# EAGLE board parametric_eq (EAGLE 7.2.0)
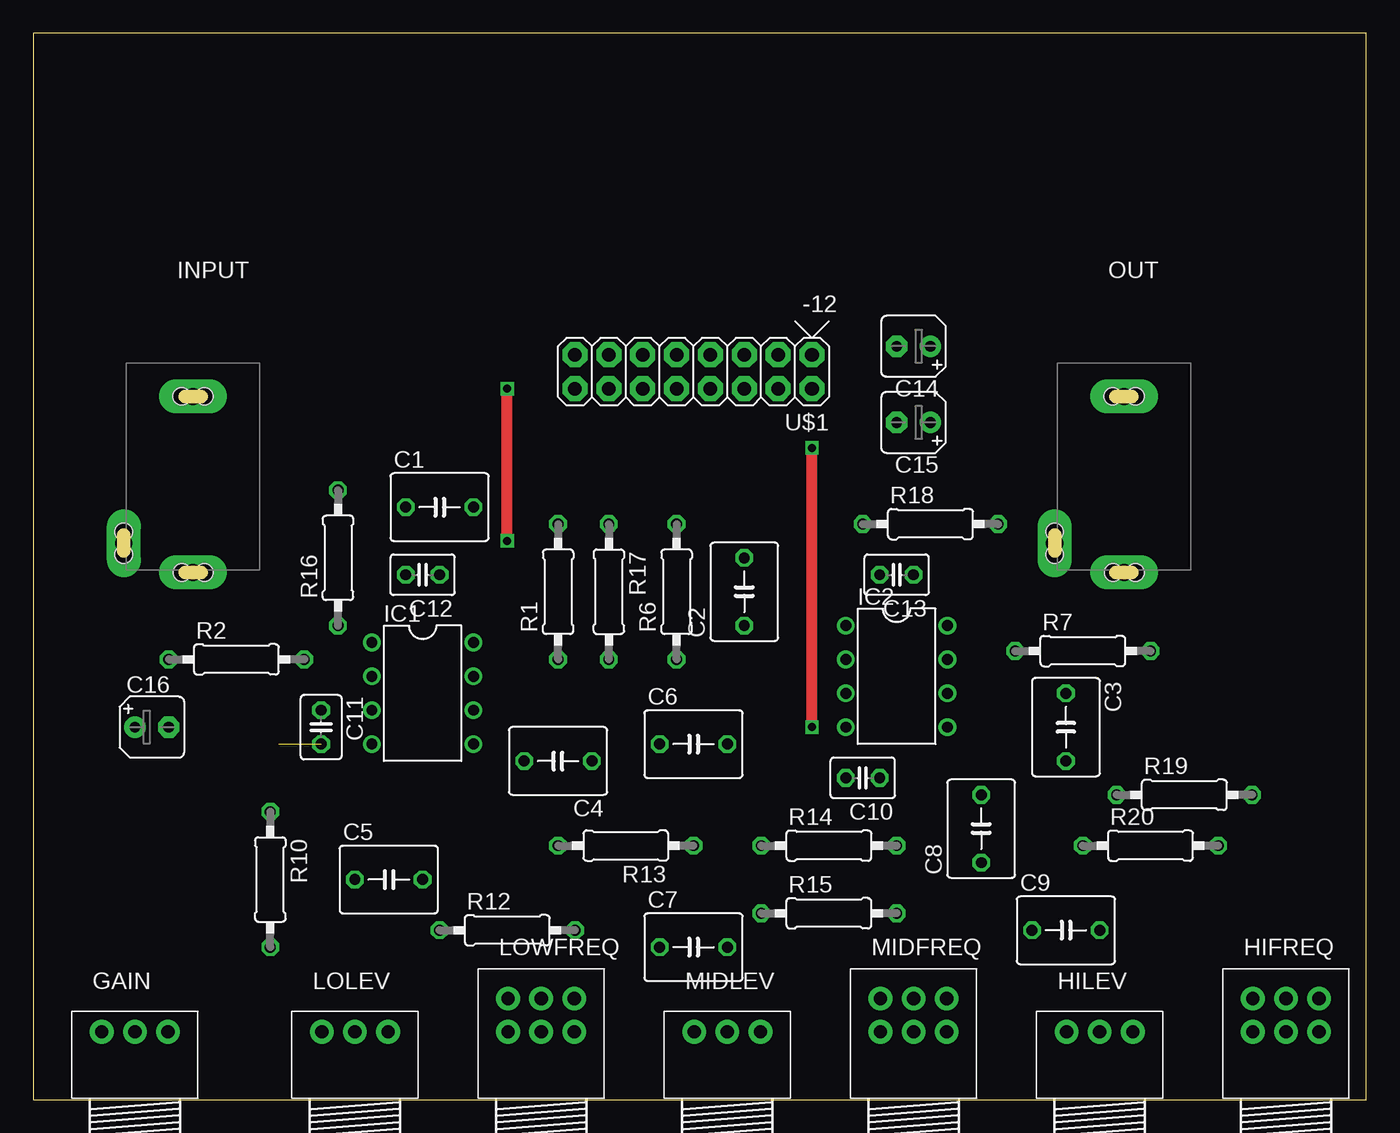
[diagram p0: board, top side]
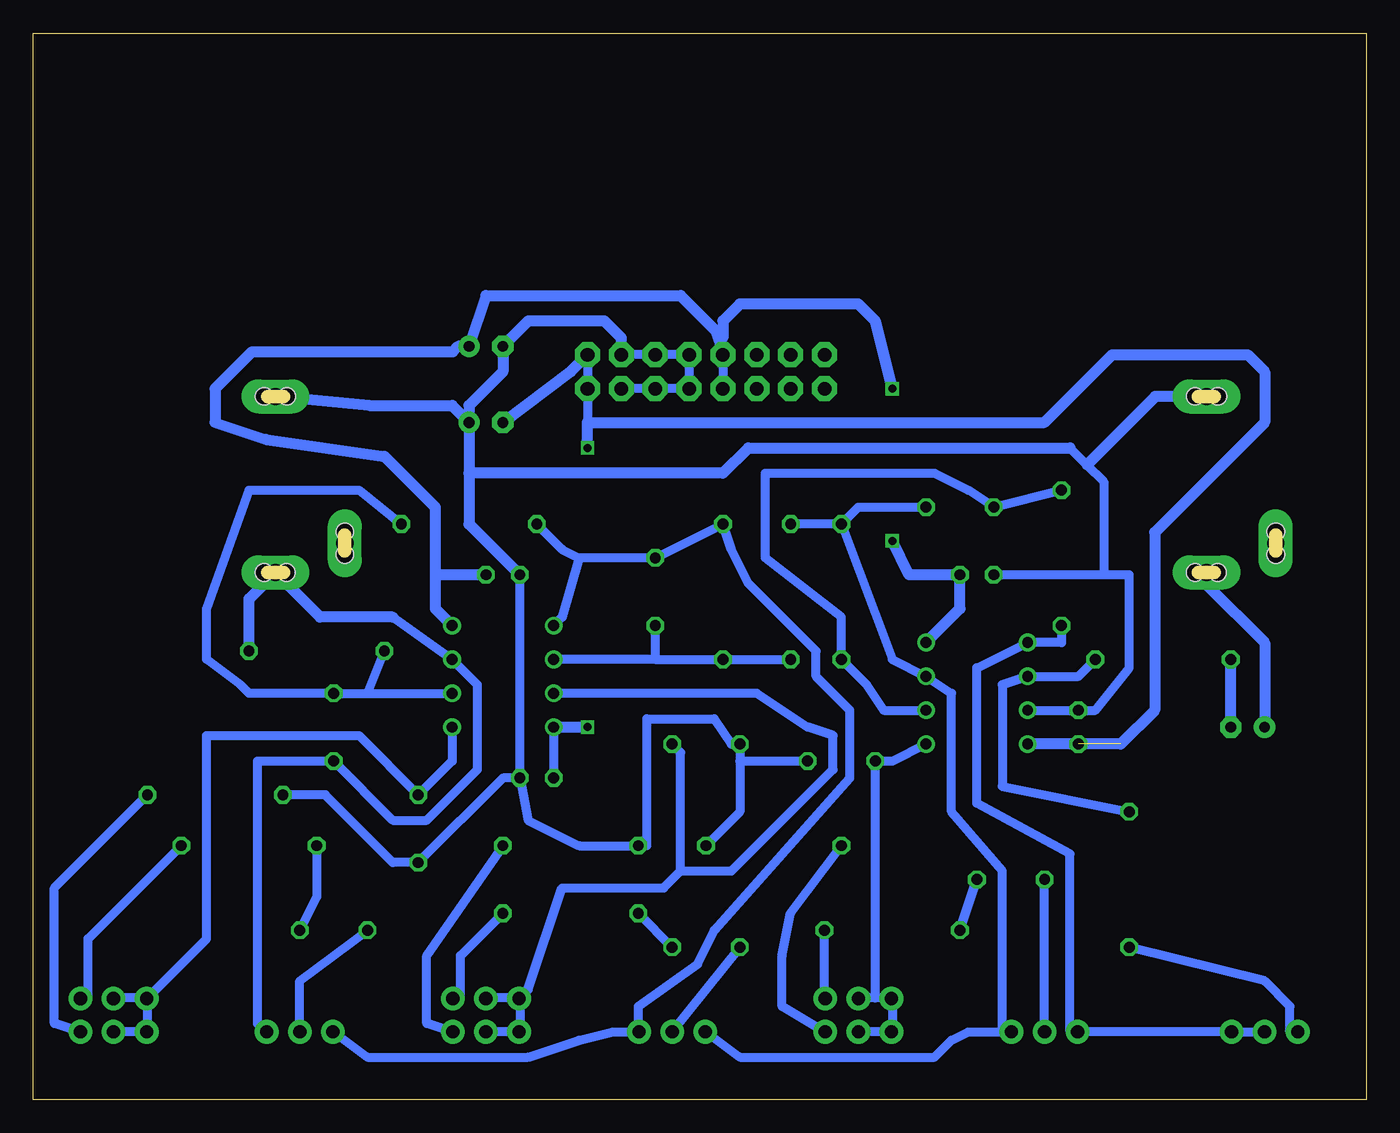
[diagram p1: board, bottom side, seen from below]

Size 100 x 80 mm. Coordinates in mm from the lower left corner, seen from the top.
Outline: 0,0 100,0 100,80 0,80 0,0
Copper layers (1*16): Top 0.035mm / dielectric 1.5mm / Bottom 0.035mm
Design rules "default *": minimum track width 26mil, minimum drill 24mil, track to track 18mil, track to pad 18mil, pad to pad 18mil, via to via 18mil, smd to smd 8mil, copper to edge 0mil, drill to drill 8mil, minimum pad ring 10mil, minimum via ring 8mil, stop-mask expansion 4mil, vias tented up to drill 0mil, thermal gap 10mil

## Footprints (pad centres in the part's own frame; a part is rotated, then mirrored left to right if it is on the bottom)
C050-050X075 = drill 0.813 octagon: 1 -2.54,0; 2 2.54,0
C025-030X050 = drill 0.813 octagon: 1 -1.27,0; 2 1.27,0
B45181A = drill 0.813 pad 1.6: + -1.27,0 | drill 0.813 pad 1.6 octagon: - 1.27,0
PTD901 = drill 1 pad 1.778: 1 -2.485,0; 2 0,0; 3 2.485,0
PTD902 = drill 1 pad 1.778: 1-1 -2.485,0; 1-2 0,0; 1-3 2.485,0; 2-1 -2.485,2.485; 2-2 0,2.485; 2-3 2.485,2.485
DIL08 = drill 0.813 pad 1.27: 1 -3.81,-3.81; 2 -1.27,-3.81; 3 1.27,-3.81; 4 3.81,-3.81; 5 3.81,3.81; 6 1.27,3.81; 7 -1.27,3.81; 8 -3.81,3.81
ERTHENVAR-JACK-90DEG = drill 1.3 pad 2.54 long: P$1 5,-2.5; P$2 -0.2,-13.5; P$3 5,-15.7 | hole 1.3: 5.842,-2.489; 4.14,-2.489; -0.203,-12.649; -0.203,-14.351; 5.842,-15.697; 4.166,-15.697
0207/10 = drill 0.813 octagon: 1 -5.08,0; 2 5.08,0
POWER_16 = drill 1.016 pad 1.88 octagon: 1 -6.35,-1.27; 2 -6.35,1.27; 3 -3.81,-1.27; 4 -3.81,1.27; 5 -1.27,-1.27; 6 -1.27,1.27; 7 1.27,-1.27; 8 1.27,1.27; 9 3.81,-1.27; 10 3.81,1.27; 11 6.35,-1.27; 12 6.35,1.27; 13 8.89,-1.27; 14 8.89,1.27; 15 11.43,-1.27; 16 11.43,1.27

## Placement (x,y rotation side)
C1  330p  [C050-050X075]  30.48,44.45 0 top
C2  330p  [C050-050X075]  53.34,38.1 90 top
C3  330p  [C050-050X075]  77.47,27.94 270 top
C4  39n  [C050-050X075]  39.37,25.4 180 top
C5  100n  [C050-050X075]  26.67,16.51 0 top
C6  5n6  [C050-050X075]  49.53,26.67 0 top
C7  15n  [C050-050X075]  49.53,11.43 0 top
C8  1n8  [C050-050X075]  71.12,20.32 90 top
C9  4n7  [C050-050X075]  77.47,12.7 0 top
C10  0.1u  [C025-030X050]  62.23,24.13 180 top
C11  0.1u  [C025-030X050]  21.59,27.94 270 top
C12  0.1u  [C025-030X050]  29.21,39.37 180 top
C13  0.1u  [C025-030X050]  64.77,39.37 180 top
C14  10u  [B45181A]  66.04,56.52 180 top
C15  10u  [B45181A]  66.04,50.8 180 top
C16  10u  [B45181A]  8.89,27.94 0 top
GAIN  5k lin  [PTD901]  7.62,5.08 0 top
HIFREQ  50k log  [PTD902]  93.98,5.08 0 top
HILEV  5k lin  [PTD901]  80.01,5.08 0 top
IC1  TL072P  [DIL08]  29.21,30.48 270 top
IC2  TL072P  [DIL08]  64.77,31.75 270 top
INPUT  AUDIO-JACK  [ERTHENVAR-JACK-90DEG]  6.99,55.24 0 top
LOLEV  5k lin  [PTD901]  24.13,5.08 0 top
LOWFREQ  50k log  [PTD902]  38.1,5.08 0 top
MIDFREQ  50k log  [PTD902]  66.04,5.08 0 top
MIDLEV  5k lin  [PTD901]  52.07,5.08 0 top
OUT  AUDIO-JACK  [ERTHENVAR-JACK-90DEG]  76.83,55.24 0 top
R1  2k2  [0207/10]  39.37,38.1 90 top
R2  2k  [0207/10]  15.24,33.02 0 top
R6  2k2  [0207/10]  48.26,38.1 90 top
R7  2k2  [0207/10]  78.74,33.66 0 top
R10  1k  [0207/10]  17.78,16.51 270 top
R12  4k7  [0207/10]  35.56,12.7 0 top
R13  5k1  [0207/10]  44.45,19.05 180 top
R14  2k7  [0207/10]  59.69,19.05 0 top
R15  2k7  [0207/10]  59.69,13.97 0 top
R16  2k2  [0207/10]  22.86,40.64 90 top
R17  2k2  [0207/10]  43.18,38.1 270 top
R18  2k2  [0207/10]  67.31,43.18 0 top
R19  4k7  [0207/10]  86.36,22.86 0 top
R20  4k3  [0207/10]  83.82,19.05 0 top
U$1  POWER  [POWER_16]  52.07,54.61 180 top

## Library data of the parts
C1-C16 R1 R2 R6 R7 R10 R12-R20 = rcl
GAIN HIFREQ HILEV LOLEV LOWFREQ MIDFREQ MIDLEV = bourns_ptd
IC1 IC2 = linear
INPUT OUT = erthenvar
U$1 = eurorack

## Nets
+12V: C12.1 C13.1 C14.+ IC1.8 IC2.8 U$1.9 U$1.10
-12V: C10.2 C11.2 C15.- IC1.4 IC2.4 U$1.1 U$1.2
GND: C4.1 C6.1 C8.1 C10.1 C11.1 C12.2 C13.2 C14.- C15.+ IC1.3 INPUT.P$1 OUT.P$1 R13.1 R14.1 R19.1 U$1.3 U$1.4 U$1.5 U$1.6 U$1.7 U$1.8
N$1: IC1.2 R2.2 R10.1
N$2: GAIN.1 R10.2
N$3: C2.1 IC2.2 R6.1 R17.2
N$4: C3.1 IC2.6 R7.1 R18.2
N$5: C1.1 IC1.6 R1.1 R16.2
N$6: C1.2 IC1.7 LOLEV.3 MIDLEV.1 R1.2 R17.1
N$7: C2.2 HILEV.1 IC2.1 MIDLEV.3 R6.2 R18.1
N$8: C3.2 HILEV.3 IC2.7 OUT.P$3 R7.2
N$9: C16.+ INPUT.P$3
N$10: LOWFREQ.1-3 R13.2
N$11: C5.2 R12.1
N$12: LOWFREQ.2-3 R12.2
N$13: C5.1 LOLEV.2
N$14: C7.1 MIDLEV.2
N$15: C7.2 R15.1
N$16: MIDFREQ.2-3 R15.2
N$17: MIDFREQ.1-3 R14.2
N$18: HIFREQ.1-3 R19.2
N$19: HIFREQ.2-3 R20.2
N$20: C9.2 R20.1
N$21: C9.1 HILEV.2
N$22: C4.2 IC1.5 LOWFREQ.1-1 LOWFREQ.1-2 LOWFREQ.2-1 LOWFREQ.2-2
N$23: GAIN.2 GAIN.3 IC1.1 LOLEV.1 R16.1
N$24: C16.- R2.1
N$27: C6.2 IC2.3 MIDFREQ.1-1 MIDFREQ.1-2 MIDFREQ.2-1 MIDFREQ.2-2
N$28: C8.2 HIFREQ.1-1 HIFREQ.1-2 HIFREQ.2-1 HIFREQ.2-2 IC2.5

## Tracks (layer width: path | path; a pad name or v marks a point on that pad's centre or on a via)
+12V  (via drill 0.6)
  Top 0.813: v35.56,41.91 v35.56,53.34
  Bottom 0.66: U$1.10 U$1.9 48.9,57.78
  Bottom 0.813: v35.56,41.91 34.29,39.37 C12.1 30.48,36.83 IC1.8 | v35.56,53.34 36.83,58.42 38.1,59.69 46.99,59.69 48.26,58.42 48.26,57.15 48.9,57.78 51.44,60.33 66.04,60.33 C14.+ 68.11,56.52 68.54,56.09 83.61,56.09 86.36,53.34 86.36,50.8 82.55,49.53 73.66,48.26 69.85,44.45 69.85,39.37 | C13.1 69.85,39.37 | 69.85,39.37 69.85,36.83 IC2.8
-12V  (via drill 0.6)  (1 unrouted)
  Top 0.813: v58.42,27.94 v58.42,48.9
  Bottom 0.66: U$1.1 U$1.2 58.42,50.8 | IC2.4 C10.2
  Bottom 0.813: IC2.4 v58.42,27.94 | v58.42,48.9 58.42,50.8 24.13,50.8 19.05,55.88 8.89,55.88 7.62,54.61 7.62,50.8 15.88,42.55 15.88,29.21 18.41,26.67 IC1.4 | C15.- 59.69,54.61 U$1.1
GND
  Bottom 0.66: IC1.3 C11.1 20.32,29.21 17.78,32.38 17.78,39.37 19.68,39.37 | 19.68,39.37 C12.2 | R13.1 46.99,21.59 46.99,25.4 | 46.99,25.4 C6.1 47.62,26.67 48.9,28.57 53.98,28.57 53.98,19.05 R14.1 59.05,19.05 62.87,20.95 C10.1 | 46.99,25.4 C4.1 | U$1.4 U$1.6 U$1.8 U$1.7 U$1.5 U$1.3 | C10.1 64.77,24.13 C8.1 73.03,17.78 78.11,22.86 R19.1 | C10.1 C13.2 | 19.68,39.37 19.68,46.35 20.95,47.62 22.23,48.9
  Bottom 0.813: OUT.P$1 74.81,52.07 68.58,52.07 C15.+ | 67.31,46.99 48.26,46.99 46.35,48.9 22.23,48.9 | C15.+ 67.31,46.99 | 67.31,46.99 67.31,43.18 C13.2 | U$1.3 55.88,57.15 57.15,58.42 62.87,58.42 C14.- 64.77,54.61 67.31,52.07 C15.+ | INPUT.P$1 15.84,52.74 20.95,47.62
N$1
  Bottom 0.66: R10.1 27.3,23.5 27.3,31.11 IC1.2 21.59,31.75 R2.2
N$2
  Bottom 0.66: R10.2 7.62,8.89 5.71,6.99 5.71,5.08 GAIN.1
N$3
  Bottom 0.66: R17.2 R6.1 53.34,33.02 | 53.34,33.02 IC2.2 | C2.1 53.34,33.02
N$4
  Bottom 0.66: 74.93,30.48 C3.1 83.82,30.48 84.45,31.11 87,33.02 87,36.83 83.82,45.72 75.56,45.72 R18.2 | 74.93,30.48 IC2.6 | 74.93,30.48 R7.1
N$5
  Bottom 0.66: R16.2 C1.1 29.84,45.72 32.38,46.99 45.09,46.99 45.09,40.64 39.37,36.2 R1.1 37.47,31.11 36.2,29.21 IC1.6
N$6
  Bottom 0.66: R1.2 35.56,33.02 IC1.7 31.11,30.48 31.11,21.59 27.3,17.14 27.3,5.08 | R1.2 R17.1 | C1.2 38.1,44.45 R1.2 | 27.3,5.08 29.84,5.08 31.11,4.45 32.38,3.17 46.99,3.17 49.53,5.08 MIDLEV.1 | 27.3,5.08 LOLEV.3 26.67,5.08
N$7
  Bottom 0.66: IC2.1 60.33,36.2 59.05,40.64 | 59.05,40.64 60.33,41.27 R18.1 | 59.05,40.64 C2.2 R6.2 47.62,41.27 46.35,38.73 41.27,33.66 41.27,31.75 38.73,29.21 38.73,24.13 48.9,12.7 50.16,10.16 54.61,6.99 54.61,5.71 MIDLEV.3 56.52,5.08 59.05,4.45 62.87,3.17 74.93,3.17 77.47,5.08 HILEV.1
N$8
  Bottom 0.66: 73.03,36.2 IC2.7 66.67,31.11 66.67,24.77 70.48,20.95 73.03,20.95 C3.2 83.19,25.4 83.19,5.71 82.55,5.08 HILEV.3
  Bottom 0.813: 73.03,36.2 78.48,36.2 OUT.P$3 83.82,37.56 R7.2
N$9
  Bottom 0.813: INPUT.P$3 11.98,38.66 7.62,34.29 C16.+
N$10
  Bottom 0.66: R13.2 43.18,13.97 43.81,10.79 43.81,6.99 40.64,5.08 LOWFREQ.1-3
N$11
  Bottom 0.66: R12.1 C5.2
N$12
  Bottom 0.66: R12.2 40.64,7.62 LOWFREQ.2-3
N$13
  Bottom 0.66: LOLEV.2 C5.1
N$14
  Bottom 0.66: MIDLEV.2 C7.1
N$15
  Bottom 0.66: R15.1 C7.2
N$16
  Bottom 0.66: R15.2 67.94,10.79 67.94,7.62 MIDFREQ.2-3
N$17
  Bottom 0.66: R14.2 70.48,10.79 70.48,5.71 68.58,5.08 MIDFREQ.1-3
N$18
  Bottom 0.66: R19.2 98.42,15.88 98.42,5.71 96.52,5.08 HIFREQ.1-3
N$19
  Bottom 0.66: R20.2 95.89,12.06 95.89,7.62 HIFREQ.2-3
N$20
  Bottom 0.66: C9.2 78.74,15.24 R20.1
N$21
  Bottom 0.66: C9.1 80.01,8.89 HILEV.2
N$22
  Bottom 0.66: IC1.5 35.56,25.4 C4.2 36.83,7.62 | LOWFREQ.1-2 LOWFREQ.1-1 35.56,5.08 35.56,6.99 LOWFREQ.2-1 36.2,7.62 36.83,7.62 | 36.83,7.62 38.1,7.62 LOWFREQ.2-2
N$23
  Bottom 0.66: R16.1 22.86,34.29 IC1.1 29.21,32.38 29.21,22.23 22.23,18.41 22.23,5.08 LOLEV.1 GAIN.3 GAIN.2
N$24
  Bottom 0.813: C16.- R2.1
N$27
  Bottom 0.66: C6.2 51.44,26.04 51.44,17.14 | 51.44,17.14 52.7,15.88 60.33,15.88 62.87,8.26 MIDFREQ.2-1 | IC2.3 45.72,30.48 41.91,27.94 40.01,27.3 40.01,24.77 47.62,17.14 51.44,17.14 | MIDFREQ.2-1 63.5,6.99 63.5,5.08 MIDFREQ.1-1 MIDFREQ.1-2 | MIDFREQ.2-2 66.04,7.62 64.14,7.62 MIDFREQ.2-1
N$28
  Bottom 0.66: IC2.5 68.58,25.4 C8.2 75.56,27.3 87,27.3 87,12.06 HIFREQ.2-1 | HIFREQ.2-1 91.44,6.99 91.44,5.08 HIFREQ.1-1 HIFREQ.1-2 | HIFREQ.2-2 93.98,7.62 92.08,7.62 HIFREQ.2-1